# EAGLE board zamek - Copy (EAGLE 6.4), part 1 of 2
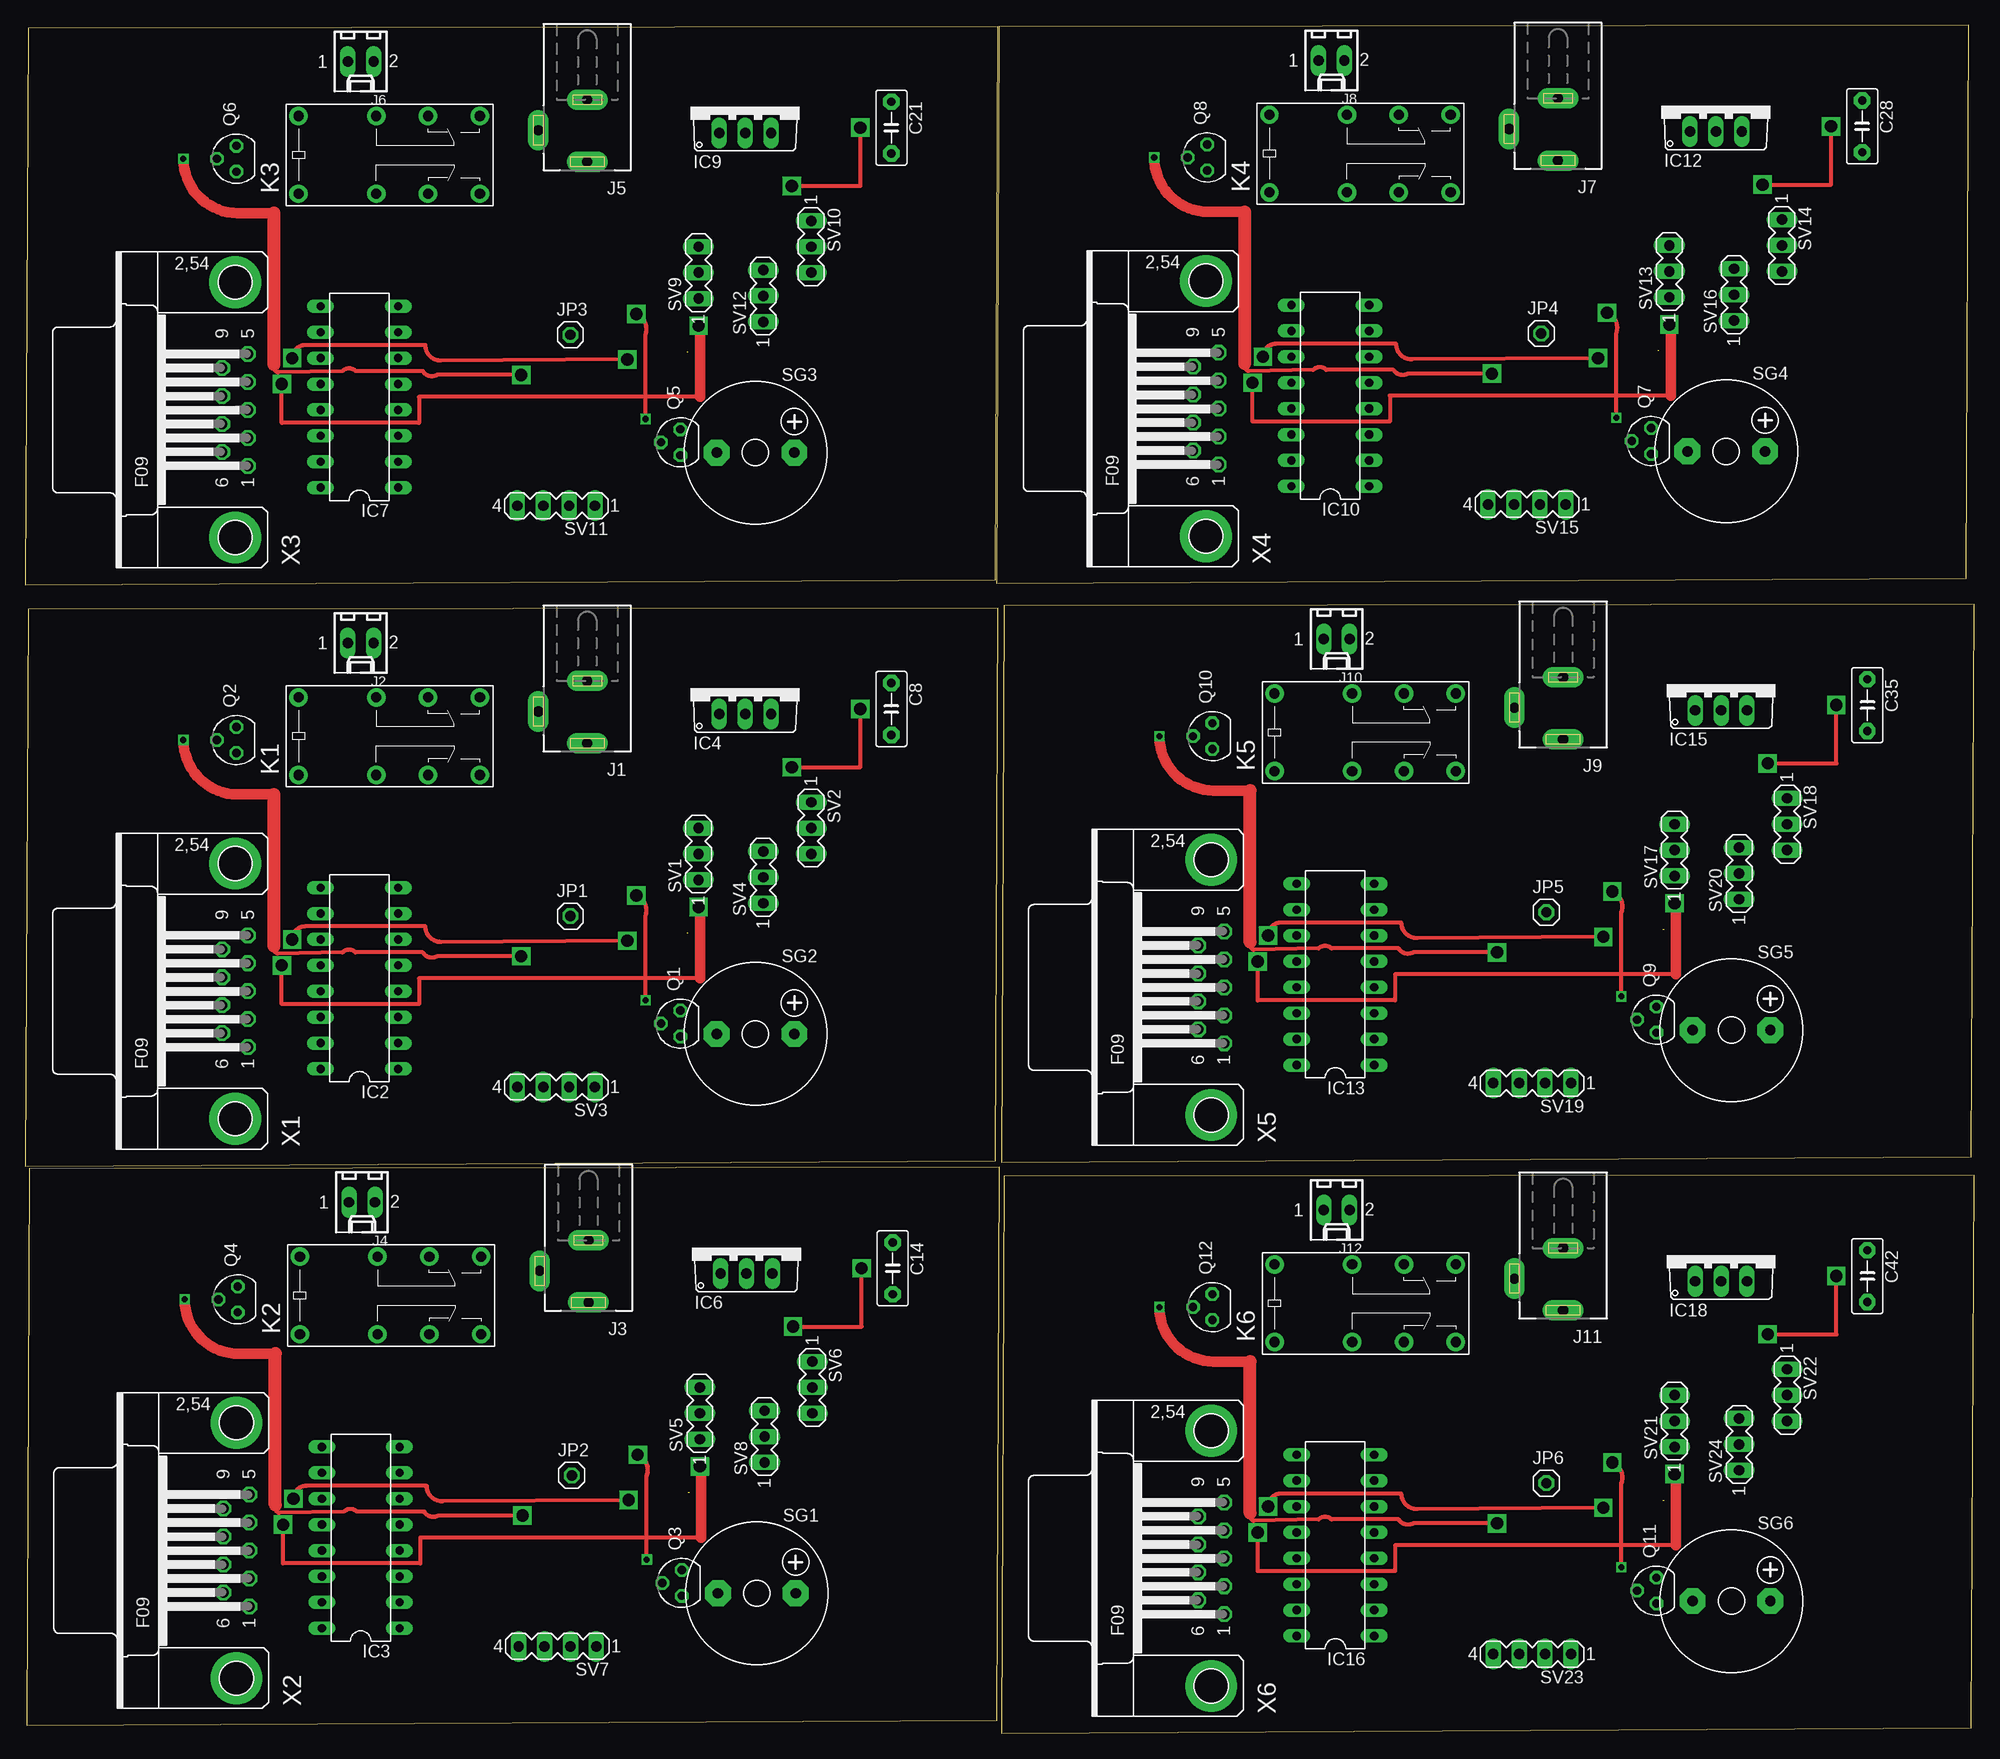
[diagram p0: board, top side]
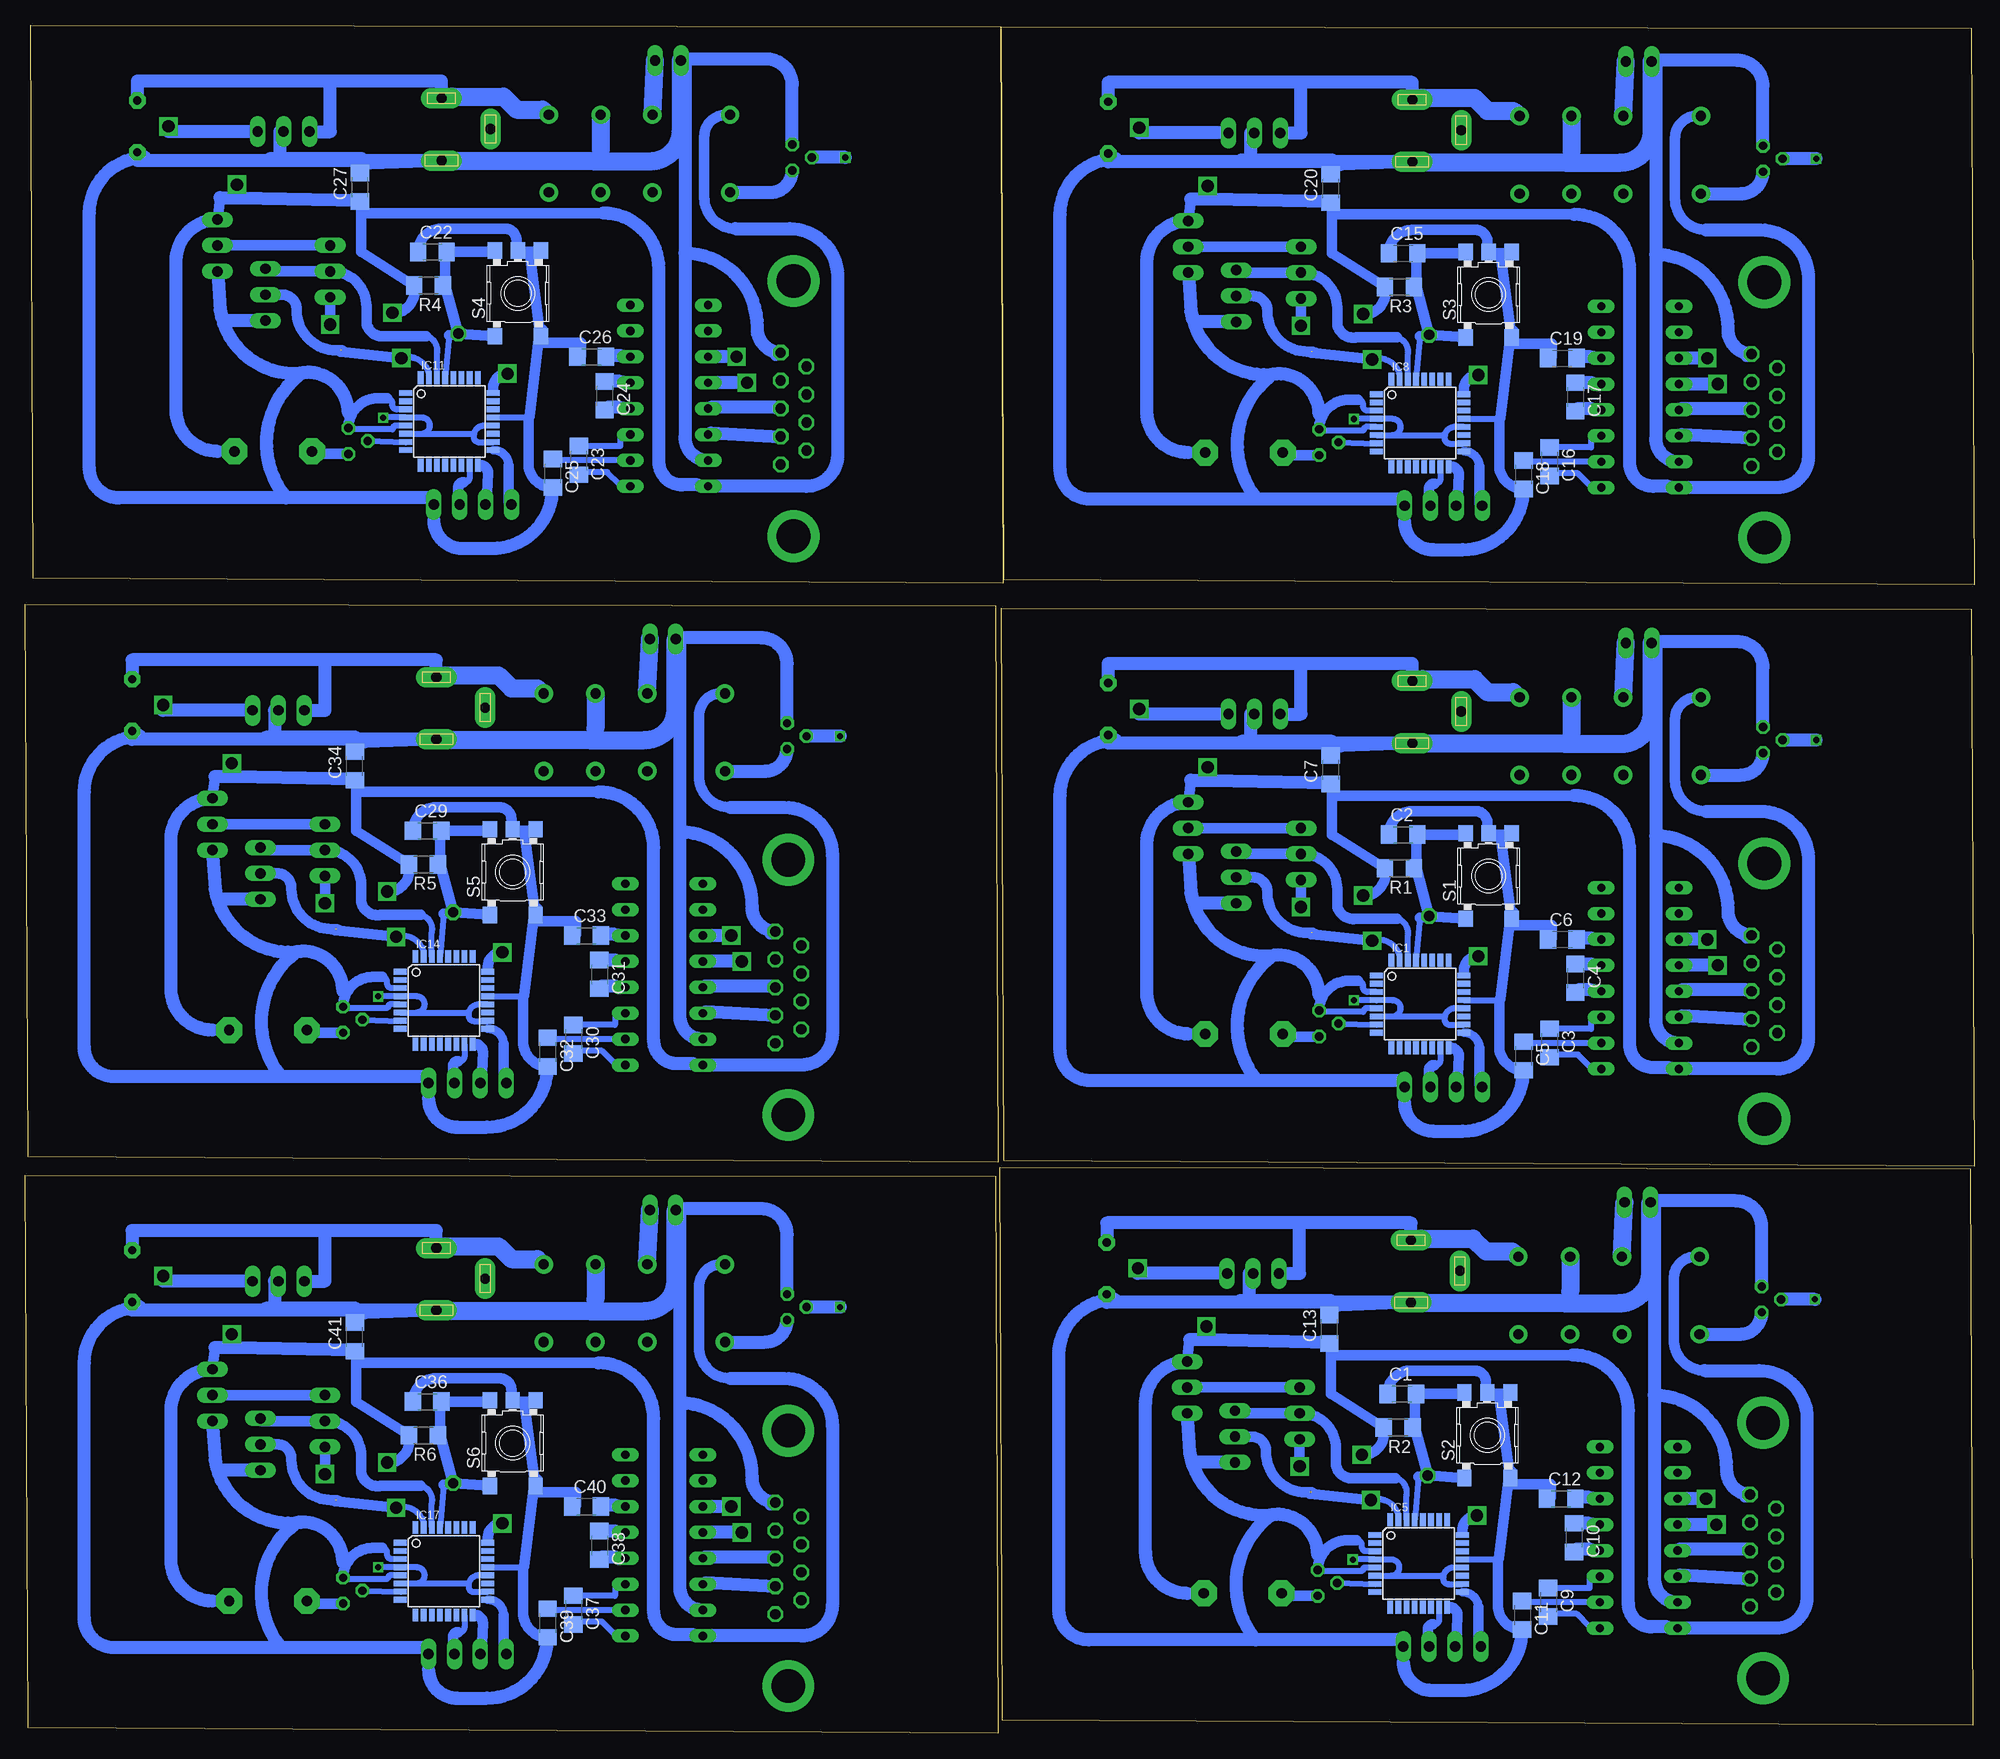
[diagram p1: board, bottom side, seen from below]

Size 191.19 x 167.5 mm. Coordinates in mm from the lower left corner, seen from the top.
Outline: 0,55.63 95.17,56.13 95.43,110.35 0.25,110.23 0,55.63
Outline: 0.13,0.76 95.3,1.27 95.56,55.49 0.38,55.36 0.13,0.76
Outline: 0,112.65 95.17,113.16 95.43,167.38 0.25,167.25 0,112.65
Outline: 95.25,112.78 190.42,113.28 190.68,167.5 95.5,167.38 95.25,112.78
Outline: 95.76,56.01 190.93,56.52 191.19,110.73 96.01,110.61 95.76,56.01
Outline: 95.76,0 190.93,0.51 191.19,54.73 96.01,54.6 95.76,0
Copper layers (1*16): Top 0.035mm / dielectric 1.5mm / Bottom 0.035mm
Design rules "default *": minimum track width 20mil, minimum drill 24mil, track to track 15mil, track to pad 15mil, pad to pad 15mil, via to via 15mil, smd to smd 8mil, copper to edge 40mil, drill to drill 8mil, minimum pad ring 10mil, minimum via ring 8mil, stop-mask expansion 4mil, vias tented up to drill 0mil, thermal gap 10mil

## Footprints (pad centres in the part's own frame; a part is rotated, then mirrored left to right if it is on the bottom)
C1206 = smd 1.6 x 1.8: 1 -1.4,0; 2 1.4,0
C5B3 = drill 0.813 pad 1.6 octagon: 1 -2.54,0; 2 2.54,0
TQFP32-08 = smd 1.27 x 0.559: 1 -4.293,2.8; 2 -4.293,2; 3 -4.293,1.2; 4 -4.293,0.4; 5 -4.293,-0.4; 6 -4.293,-1.2; 7 -4.293,-2; 8 -4.293,-2.8; 17 4.293,-2.8; 18 4.293,-2; 19 4.293,-1.2; 20 4.293,-0.4; 21 4.293,0.4; 22 4.293,1.2; 23 4.293,2; 24 4.293,2.8 | smd 0.559 x 1.27: 9 -2.8,-4.293; 10 -2,-4.293; 11 -1.2,-4.293; 12 -0.4,-4.293; 13 0.4,-4.293; 14 1.2,-4.293; 15 2,-4.293; 16 2.8,-4.293; 25 2.8,4.293; 26 2,4.293; 27 1.2,4.293; 28 0.4,4.293; 29 -0.4,4.293; 30 -1.2,4.293; 31 -2,4.293; 32 -2.8,4.293
DIL16 = drill 0.813 long: 1 -8.89,-3.81; 2 -6.35,-3.81; 3 -3.81,-3.81; 4 -1.27,-3.81; 5 1.27,-3.81; 6 3.81,-3.81; 7 6.35,-3.81; 8 8.89,-3.81; 9 8.89,3.81; 10 6.35,3.81; 11 3.81,3.81; 12 1.27,3.81; 13 -1.27,3.81; 14 -3.81,3.81; 15 -6.35,3.81; 16 -8.89,3.81
TO220V = drill 1.016 long: 1 -2.54,-2.54; 2 0,-2.54; 3 2.54,-2.54
DCJ0202 = drill 1 pad 2 long: 1 0,3.1; 2 4.8,0; 3 0,-3
6410-02 = drill 1.016 long: 1 1.27,0; 2 -1.27,0
1X01 = drill 1.016 octagon: 1 0,0
G5V-2 = drill 1 pad 1.8: 1 -8.89,-3.81; 4 -1.27,-3.81; 6 3.81,-3.81; 8 8.89,-3.81; 9 8.89,3.81; 11 3.81,3.81; 13 -1.27,3.81; 16 -8.89,3.81
SOT54E = drill 0.813 octagon: D -1.27,0; G 0,1.905; S 1.27,0
R1206 = smd 1.6 x 1.803: 1 -1.422,0; 2 1.422,0
SKHMPXE010 = smd 1.6 x 1.4: 1 -4.2,2.25; 2 4.2,2.25; 3 -4.2,-2.25; 4 4.2,-2.25; 5 4.2,0
F/CM12P = drill 1.016 pad 2.54 octagon: + 3.81,0; - -3.81,0
MA03-1 = drill 1.016 long: 1 -2.54,0; 2 0,0; 3 2.54,0
MA04-1 = drill 1.016 long: 1 -3.81,0; 2 -1.27,0; 3 1.27,0; 4 3.81,0
F09HP = drill 1.016 octagon: 1 -5.486,-1.27; 2 -2.743,-1.27; 3 0,-1.27; 4 2.743,-1.27; 5 5.486,-1.27; 6 -4.115,1.27; 7 -1.372,1.27; 8 1.372,1.27; 9 4.115,1.27 | drill 3.302 pad 5.08: G1 -12.522,0; G2 12.522,0

## Placement (x,y rotation side)
C1  100n  [C1206]  56.13,33.27 0 bottom
C2  100n  [C1206]  56.01,88.14 0 bottom
C3  1u  [C1206]  41.66,67.69 270 bottom
C4  1u  [C1206]  39.12,74.04 270 bottom
C5  1u  [C1206]  44.2,66.42 270 bottom
C6  1u  [C1206]  40.39,77.85 0 bottom
C7  100n  [C1206]  63.12,94.49 90 bottom
C8  10u  [C5B3]  84.96,100.46 270 top
C9  1u  [C1206]  41.78,12.83 270 bottom
C10  1u  [C1206]  39.24,19.18 270 bottom
C11  1u  [C1206]  44.32,11.56 270 bottom
C12  1u  [C1206]  40.51,22.99 0 bottom
C13  100n  [C1206]  63.25,39.62 90 bottom
C14  10u  [C5B3]  85.09,45.59 270 top
C15  100n  [C1206]  56.01,145.16 0 bottom
C16  1u  [C1206]  41.66,124.71 270 bottom
C17  1u  [C1206]  39.12,131.06 270 bottom
C18  1u  [C1206]  44.2,123.44 270 bottom
C19  1u  [C1206]  40.39,134.87 0 bottom
C20  100n  [C1206]  63.12,151.51 90 bottom
C21  10u  [C5B3]  84.96,157.48 270 top
C22  100n  [C1206]  151.26,145.29 0 bottom
C23  1u  [C1206]  136.91,124.84 270 bottom
C24  1u  [C1206]  134.37,131.19 270 bottom
C25  1u  [C1206]  139.45,123.57 270 bottom
C26  1u  [C1206]  135.64,135 0 bottom
C27  100n  [C1206]  158.37,151.64 90 bottom
C28  10u  [C5B3]  180.21,157.61 270 top
C29  100n  [C1206]  151.76,88.52 0 bottom
C30  1u  [C1206]  137.41,68.07 270 bottom
C31  1u  [C1206]  134.87,74.42 270 bottom
C32  1u  [C1206]  139.95,66.8 270 bottom
C33  1u  [C1206]  136.14,78.23 0 bottom
C34  100n  [C1206]  158.88,94.87 90 bottom
C35  10u  [C5B3]  180.72,100.84 270 top
C36  100n  [C1206]  151.76,32.51 0 bottom
C37  1u  [C1206]  137.41,12.07 270 bottom
C38  1u  [C1206]  134.87,18.41 270 bottom
C39  1u  [C1206]  139.95,10.8 270 bottom
C40  1u  [C1206]  136.14,22.23 0 bottom
C41  100n  [C1206]  158.88,38.86 90 bottom
C42  10u  [C5B3]  180.72,44.83 270 top
IC1  MEGA8-AI  [TQFP32-08]  54.36,71.5 0 bottom
IC2  MAX232  [DIL16]  32.77,74.04 90 top
IC3  MAX232  [DIL16]  32.89,19.18 90 top
IC4  7805TV  [TO220V]  70.61,102.49 0 top
IC5  MEGA8-AI  [TQFP32-08]  54.48,16.64 0 bottom
IC6  7805TV  [TO220V]  70.74,47.62 0 top
IC7  MAX232  [DIL16]  32.77,131.06 90 top
IC8  MEGA8-AI  [TQFP32-08]  54.36,128.52 0 bottom
IC9  7805TV  [TO220V]  70.61,159.51 0 top
IC10  MAX232  [DIL16]  128.02,131.19 90 top
IC11  MEGA8-AI  [TQFP32-08]  149.61,128.65 0 bottom
IC12  7805TV  [TO220V]  165.86,159.64 0 top
IC13  MAX232  [DIL16]  128.52,74.42 90 top
IC14  MEGA8-AI  [TQFP32-08]  150.11,71.88 0 bottom
IC15  7805TV  [TO220V]  166.37,102.87 0 top
IC16  MAX232  [DIL16]  128.52,18.41 90 top
IC17  MEGA8-AI  [TQFP32-08]  150.11,15.88 0 bottom
IC18  7805TV  [TO220V]  166.37,46.86 0 top
J1  DCJ0202  [DCJ0202]  55.12,100.2 180 top
J2  OUT FOR DOOR  [6410-02]  32.89,106.93 180 top
J3  DCJ0202  [DCJ0202]  55.25,45.34 180 top
J4  OUT FOR DOOR  [6410-02]  33.02,52.07 180 top
J5  DCJ0202  [DCJ0202]  55.12,157.23 180 top
J6  OUT FOR DOOR  [6410-02]  32.89,163.96 180 top
J7  DCJ0202  [DCJ0202]  150.37,157.35 180 top
J8  OUT FOR DOOR  [6410-02]  128.14,164.08 180 top
J9  DCJ0202  [DCJ0202]  150.88,100.58 180 top
J10  OUT FOR DOOR  [6410-02]  128.65,107.31 180 top
J11  DCJ0202  [DCJ0202]  150.88,44.58 180 top
J12  OUT FOR DOOR  [6410-02]  128.65,51.31 180 top
JP1  [1X01]  53.47,80.14 0 top
JP2  [1X01]  53.59,25.27 0 top
JP3  [1X01]  53.47,137.16 0 top
JP4  [1X01]  148.72,137.29 0 top
JP5  [1X01]  149.22,80.52 0 top
JP6  [1X01]  149.22,24.51 0 top
K1  G5V-2  [G5V-2]  35.69,97.79 0 top
K2  G5V-2  [G5V-2]  35.81,42.93 0 top
K3  G5V-2  [G5V-2]  35.69,154.81 0 top
K4  G5V-2  [G5V-2]  130.94,154.94 0 top
K5  G5V-2  [G5V-2]  131.44,98.17 0 top
K6  G5V-2  [G5V-2]  131.44,42.16 0 top
Q1  BS170  [SOT54E]  64.26,69.6 90 top
Q2  BS170  [SOT54E]  20.7,97.41 90 top
Q3  BS170  [SOT54E]  64.39,14.73 90 top
Q4  BS170  [SOT54E]  20.83,42.55 90 top
Q5  BS170  [SOT54E]  64.26,126.62 90 top
Q6  BS170  [SOT54E]  20.7,154.43 90 top
Q7  BS170  [SOT54E]  159.51,126.75 90 top
Q8  BS170  [SOT54E]  115.95,154.56 90 top
Q9  BS170  [SOT54E]  160.02,69.98 90 top
Q10  BS170  [SOT54E]  116.46,97.79 90 top
Q11  BS170  [SOT54E]  160.02,13.97 90 top
Q12  BS170  [SOT54E]  116.46,41.78 90 top
R1  10k  [R1206]  56.39,84.84 180 bottom
R2  10k  [R1206]  56.52,29.97 180 bottom
R3  10k  [R1206]  56.39,141.86 180 bottom
R4  10k  [R1206]  151.64,141.99 180 bottom
R5  10k  [R1206]  152.15,85.22 180 bottom
R6  10k  [R1206]  152.15,29.21 180 bottom
S1  SKHMPSE010  [SKHMPXE010]  47.62,84.07 90 bottom
S2  SKHMPSE010  [SKHMPXE010]  47.75,29.21 90 bottom
S3  SKHMPSE010  [SKHMPXE010]  47.62,141.1 90 bottom
S4  SKHMPSE010  [SKHMPXE010]  142.88,141.22 90 bottom
S5  SKHMPSE010  [SKHMPXE010]  143.38,84.45 90 bottom
S6  SKHMPSE010  [SKHMPXE010]  143.38,28.45 90 bottom
SG1  F/CM12P  [F/CM12P]  71.75,13.72 0 top
SG2  F/CM12P  [F/CM12P]  71.63,68.58 0 top
SG3  F/CM12P  [F/CM12P]  71.63,125.6 0 top
SG4  F/CM12P  [F/CM12P]  166.88,125.73 0 top
SG5  F/CM12P  [F/CM12P]  167.39,68.96 0 top
SG6  F/CM12P  [F/CM12P]  167.39,12.95 0 top
SV1  [MA03-1]  66.04,86.23 90 top
SV2  [MA03-1]  77.09,88.77 270 top
SV3  [MA04-1]  52.07,63.37 180 top
SV4  [MA03-1]  72.39,83.95 90 top
SV5  [MA03-1]  66.17,31.37 90 top
SV6  [MA03-1]  77.22,33.91 270 top
SV7  [MA04-1]  52.2,8.51 180 top
SV8  [MA03-1]  72.52,29.08 90 top
SV9  [MA03-1]  66.04,143.26 90 top
SV10  [MA03-1]  77.09,145.8 270 top
SV11  [MA04-1]  52.07,120.4 180 top
SV12  [MA03-1]  72.39,140.97 90 top
SV13  [MA03-1]  161.29,143.38 90 top
SV14  [MA03-1]  172.34,145.92 270 top
SV15  [MA04-1]  147.32,120.52 180 top
SV16  [MA03-1]  167.64,141.1 90 top
SV17  [MA03-1]  161.8,86.61 90 top
SV18  [MA03-1]  172.85,89.15 270 top
SV19  [MA04-1]  147.83,63.75 180 top
SV20  [MA03-1]  168.15,84.33 90 top
SV21  [MA03-1]  161.8,30.61 90 top
SV22  [MA03-1]  172.85,33.15 270 top
SV23  [MA04-1]  147.83,7.75 180 top
SV24  [MA03-1]  168.15,28.32 90 top
X1  [F09HP]  20.57,72.77 90 top
X2  [F09HP]  20.7,17.91 90 top
X3  [F09HP]  20.57,129.79 90 top
X4  [F09HP]  115.82,129.92 90 top
X5  [F09HP]  116.33,73.15 90 top
X6  [F09HP]  116.33,17.14 90 top

## Library data of the parts
C1-C7 C9-C13 C15-C20 C22-C27 C29-C34 C36-C41 = eagle-ltspice; SPICEMODEL: NONE; SPICEPREFIX: C
C8 C14 C21 C28 C35 C42 = capacitor-wima
IC1 IC5 IC8 IC11 IC14 IC17 = atmel; MPN: ATMEGA8-16AU; OC_FARNELL: 9171371; OC_NEWARK: 73M8863
IC2 IC3 IC7 IC10 IC13 IC16 = maxim; MF: MAXIM; MPN: MAX232ACPE+; OC_FARNELL: 9723773; OC_NEWARK: 68K4544
IC4 IC6 IC9 IC12 IC15 IC18 = linear
J1 J3 J5 J7 J9 J11 = con-jack; OC_FARNELL: unknown; OC_NEWARK: unknown
J2 J4 J6 J8 J10 J12 = con-molex; OC_FARNELL: unknown; OC_NEWARK: unknown
JP1-JP6 = pinhead
K1-K6 = relay; MPN: G5V-2 5DC; OC_FARNELL: 9949488; OC_NEWARK: 78K5703
Q1-Q12 = transistor-small-signal
R1-R6 = rcl
S1-S6 = switch
SG1-SG6 = buzzer; OC_FARNELL: unknown; OC_NEWARK: unknown
SV1-SV24 = con-lstb; OC_FARNELL: unknown; OC_NEWARK: unknown
X1-X6 = con-subd; OC_FARNELL: unknown; OC_NEWARK: unknown

## Nets
12V: C8.1 IC4.1 J1.3 K1.9
12V1: C14.1 IC6.1 J3.3 K2.9
12V2: C21.1 IC9.1 J5.3 K3.9
12V3: C28.1 IC12.1 J7.3 K4.9
12V4: C35.1 IC15.1 J9.3 K5.9
12V5: C42.1 IC18.1 J11.3 K6.9
GND: C2.1 C5.2 C6.1 C7.2 C8.2 IC1.3 IC1.5 IC1.21 IC2.15 IC4.2 J1.1 J2.1 K1.11 Q1.S Q2.S S1.3 S1.4 S1.5 SV2.3 SV3.1 SV4.1 X1.5
GND1: C1.1 C11.2 C12.1 C13.2 C14.2 IC3.15 IC5.3 IC5.5 IC5.21 IC6.2 J3.1 J4.1 K2.11 Q3.S Q4.S S2.3 S2.4 S2.5 SV6.3 SV7.1 SV8.1 X2.5
GND2: C15.1 C18.2 C19.1 C20.2 C21.2 IC7.15 IC8.3 IC8.5 IC8.21 IC9.2 J5.1 J6.1 K3.11 Q5.S Q6.S S3.3 S3.4 S3.5 SV10.3 SV11.1 SV12.1 X3.5
GND3: C22.1 C25.2 C26.1 C27.2 C28.2 IC10.15 IC11.3 IC11.5 IC11.21 IC12.2 J7.1 J8.1 K4.11 Q7.S Q8.S S4.3 S4.4 S4.5 SV14.3 SV15.1 SV16.1 X4.5
GND4: C29.1 C32.2 C33.1 C34.2 C35.2 IC13.15 IC14.3 IC14.5 IC14.21 IC15.2 J9.1 J10.1 K5.11 Q9.S Q10.S S5.3 S5.4 S5.5 SV18.3 SV19.1 SV20.1 X5.5
GND5: C36.1 C39.2 C40.1 C41.2 C42.2 IC16.15 IC17.3 IC17.5 IC17.21 IC18.2 J11.1 J12.1 K6.11 Q11.S Q12.S S6.3 S6.4 S6.5 SV22.3 SV23.1 SV24.1 X6.5
MISO: IC1.16 SV3.3
MISO1: IC5.16 SV7.3
MISO2: IC8.16 SV11.3
MISO3: IC11.16 SV15.3
MISO4: IC14.16 SV19.3
MISO5: IC17.16 SV23.3
MOSI: IC1.15 SV3.2
MOSI1: IC5.15 SV7.2
MOSI2: IC8.15 SV11.2
MOSI3: IC11.15 SV15.2
MOSI4: IC14.15 SV19.2
MOSI5: IC17.15 SV23.2
N$1: C5.1 IC2.2
N$2: C6.2 IC2.6
N$3: C3.1 IC2.3
N$4: C4.1 IC2.5
N$5: C4.2 IC2.4
N$6: C3.2 IC2.1
N$7: Q1.D SG2.-
N$8: IC1.24 Q2.G
N$9: K1.1 Q2.D
N$10: IC1.7 Q1.G
N$11: J2.2 K1.13
N$12: C11.1 IC3.2
N$13: C12.2 IC3.6
N$14: C9.1 IC3.3
N$15: C10.1 IC3.5
N$16: C10.2 IC3.4
N$17: C9.2 IC3.1
N$18: IC5.24 Q4.G
N$19: IC5.7 Q3.G
N$20: K2.1 Q4.D
N$21: J4.2 K2.13
N$22: Q3.D SG1.-
N$23: C18.1 IC7.2
N$24: C19.2 IC7.6
N$25: C16.1 IC7.3
N$26: C17.1 IC7.5
N$27: C17.2 IC7.4
N$28: C16.2 IC7.1
N$29: IC8.24 Q6.G
N$30: IC8.7 Q5.G
N$31: K3.1 Q6.D
N$32: J6.2 K3.13
N$33: Q5.D SG3.-
N$34: C25.1 IC10.2
N$35: C26.2 IC10.6
N$36: C23.1 IC10.3
N$37: C24.1 IC10.5
N$38: C24.2 IC10.4
N$39: C23.2 IC10.1
N$40: IC11.24 Q8.G
N$41: IC11.7 Q7.G
N$42: K4.1 Q8.D
N$43: J8.2 K4.13
N$44: Q7.D SG4.-
N$45: C32.1 IC13.2
N$46: C33.2 IC13.6
N$47: C30.1 IC13.3
N$48: C31.1 IC13.5
N$49: C31.2 IC13.4
N$50: C30.2 IC13.1
N$51: IC14.24 Q10.G
N$52: IC14.7 Q9.G
N$53: K5.1 Q10.D
N$54: J10.2 K5.13
N$55: Q9.D SG5.-
N$56: C39.1 IC16.2
N$57: C40.2 IC16.6
N$58: C37.1 IC16.3
N$59: C38.1 IC16.5
N$60: C38.2 IC16.4
N$61: C37.2 IC16.1
N$62: IC17.24 Q12.G
N$63: IC17.7 Q11.G
N$64: K6.1 Q12.D
N$65: J12.2 K6.13
N$66: Q11.D SG6.-
RESET: C2.2 IC1.29 JP1.1 R1.1 S1.1 S1.2
RESET1: C1.2 IC5.29 JP2.1 R2.1 S2.1 S2.2
RESET2: C15.2 IC8.29 JP3.1 R3.1 S3.1 S3.2
RESET3: C22.2 IC11.29 JP4.1 R4.1 S4.1 S4.2
RESET4: C29.2 IC14.29 JP5.1 R5.1 S5.1 S5.2
RESET5: C36.2 IC17.29 JP6.1 R6.1 S6.1 S6.2
RXD: IC1.30 SV1.2 SV4.3
RXD1: IC5.30 SV5.2 SV8.3
RXD2: IC8.30 SV9.2 SV12.3
RXD3: IC11.30 SV13.2 SV16.3
RXD4: IC14.30 SV17.2 SV20.3
RXD5: IC17.30 SV21.2 SV24.3
RXD-MAX: IC2.12 SV1.1
RXD-MAX1: IC3.12 SV5.1
RXD-MAX2: IC7.12 SV9.1
RXD-MAX3: IC10.12 SV13.1
RXD-MAX4: IC13.12 SV17.1
RXD-MAX5: IC16.12 SV21.1
RXD-RFID: SV1.3 SV2.2
RXD-RFID1: SV5.3 SV6.2
RXD-RFID2: SV9.3 SV10.2
RXD-RFID3: SV13.3 SV14.2
RXD-RFID4: SV17.3 SV18.2
RXD-RFID5: SV21.3 SV22.2
RXD-RS1: IC3.13 X2.3
RXD-RS2: IC7.13 X3.3
RXD-RS3: IC10.13 X4.3
RXD-RS4: IC13.13 X5.3
RXD-RS5: IC16.13 X6.3
RXD-RS232: IC2.13 X1.3
SCK: IC1.17 SV3.4
SCK1: IC5.17 SV7.4
SCK2: IC8.17 SV11.4
SCK3: IC11.17 SV15.4
SCK4: IC14.17 SV19.4
SCK5: IC17.17 SV23.4
TXD: IC1.31 IC2.11 SV4.2
TXD1: IC3.11 IC5.31 SV8.2
TXD2: IC7.11 IC8.31 SV12.2
TXD3: IC10.11 IC11.31 SV16.2
TXD4: IC13.11 IC14.31 SV20.2
TXD5: IC16.11 IC17.31 SV24.2
TXD-RS1: IC3.14 X2.2
TXD-RS2: IC7.14 X3.2
TXD-RS3: IC10.14 X4.2
TXD-RS4: IC13.14 X5.2
TXD-RS5: IC16.14 X6.2
TXD-RS232: IC2.14 X1.2
VCC: C7.1 IC1.4 IC1.6 IC1.18 IC1.20 IC2.16 IC4.3 K1.16 R1.2 SG2.+ SV2.1
VCC1: C13.1 IC3.16 IC5.4 IC5.6 IC5.18 IC5.20 IC6.3 K2.16 R2.2 SG1.+ SV6.1
VCC2: C20.1 IC7.16 IC8.4 IC8.6 IC8.18 IC8.20 IC9.3 K3.16 R3.2 SG3.+ SV10.1
VCC3: C27.1 IC10.16 IC11.4 IC11.6 IC11.18 IC11.20 IC12.3 K4.16 R4.2 SG4.+ SV14.1
VCC4: C34.1 IC13.16 IC14.4 IC14.6 IC14.18 IC14.20 IC15.3 K5.16 R5.2 SG5.+ SV18.1
VCC5: C41.1 IC16.16 IC17.4 IC17.6 IC17.18 IC17.20 IC18.3 K6.16 R6.2 SG6.+ SV22.1